# Altium PCB J65VIA.PcbDoc
Units mil, origin at the board's own origin, x right, y up, seen from the top; angles counter-clockwise.
Board outline 2245.86 x 3635.78 mil, 2 copper layers (Top Layer, Bottom Layer); 7 components, 39 nets, 116 pads, 577 vias.
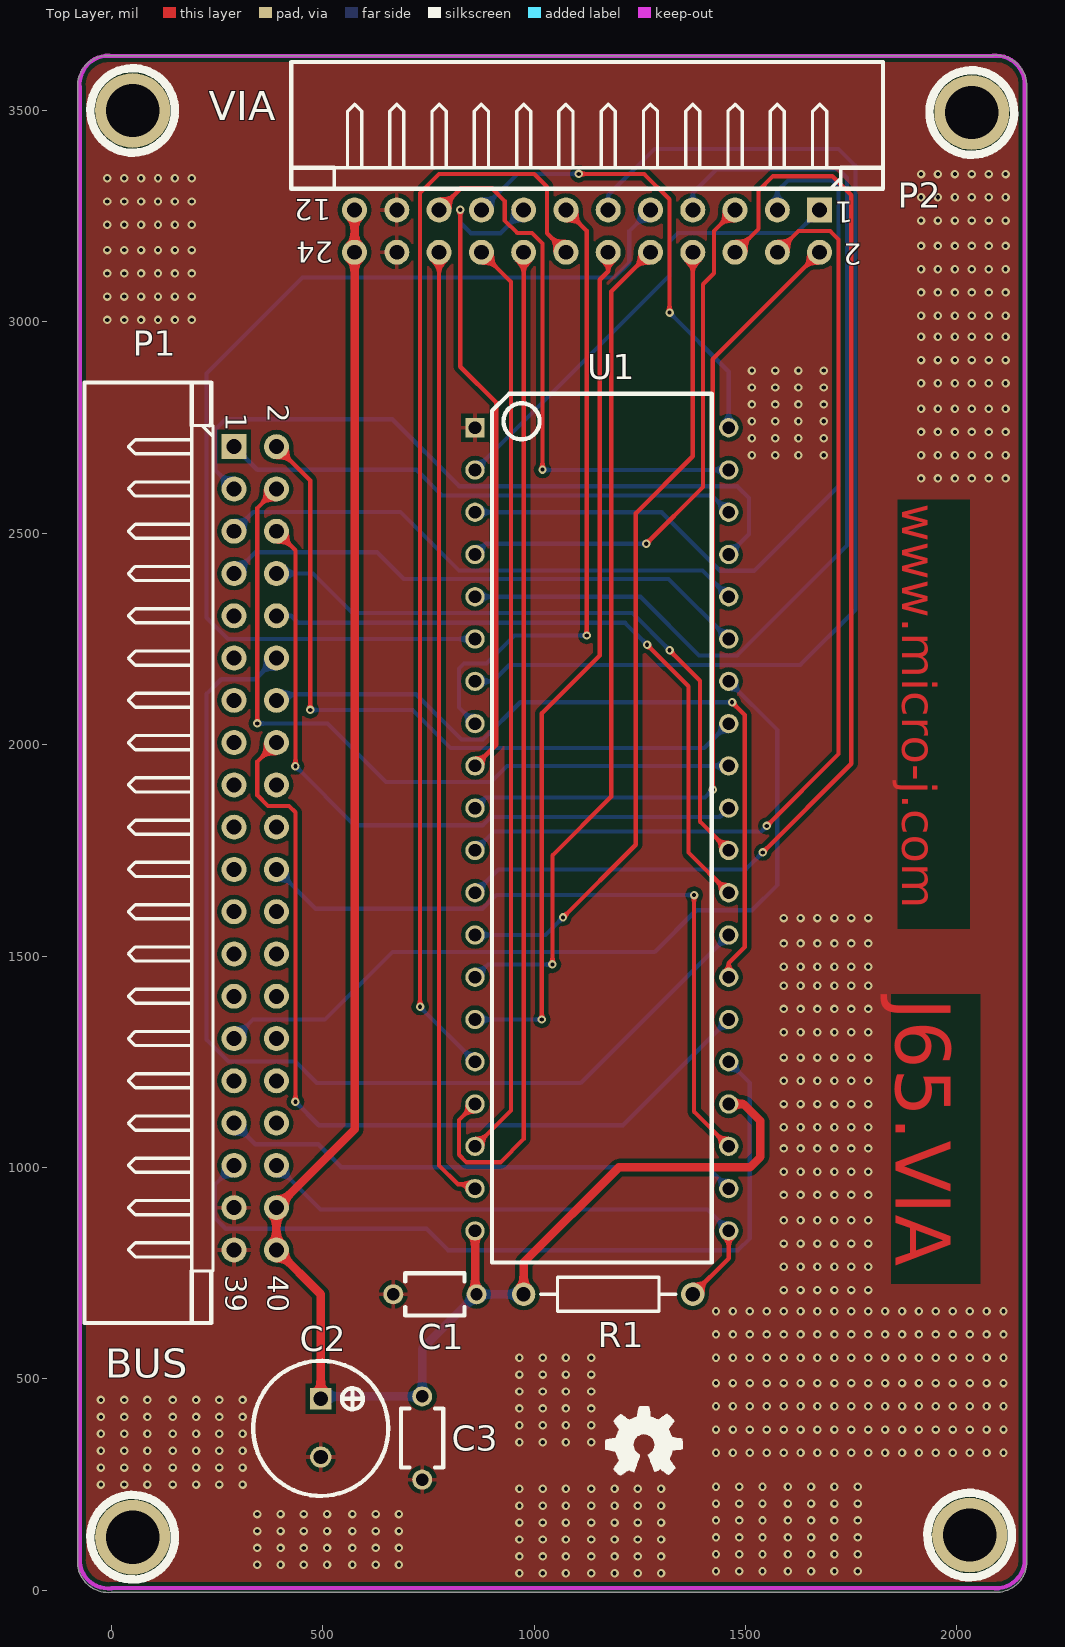
[diagram p0: Top Layer view]
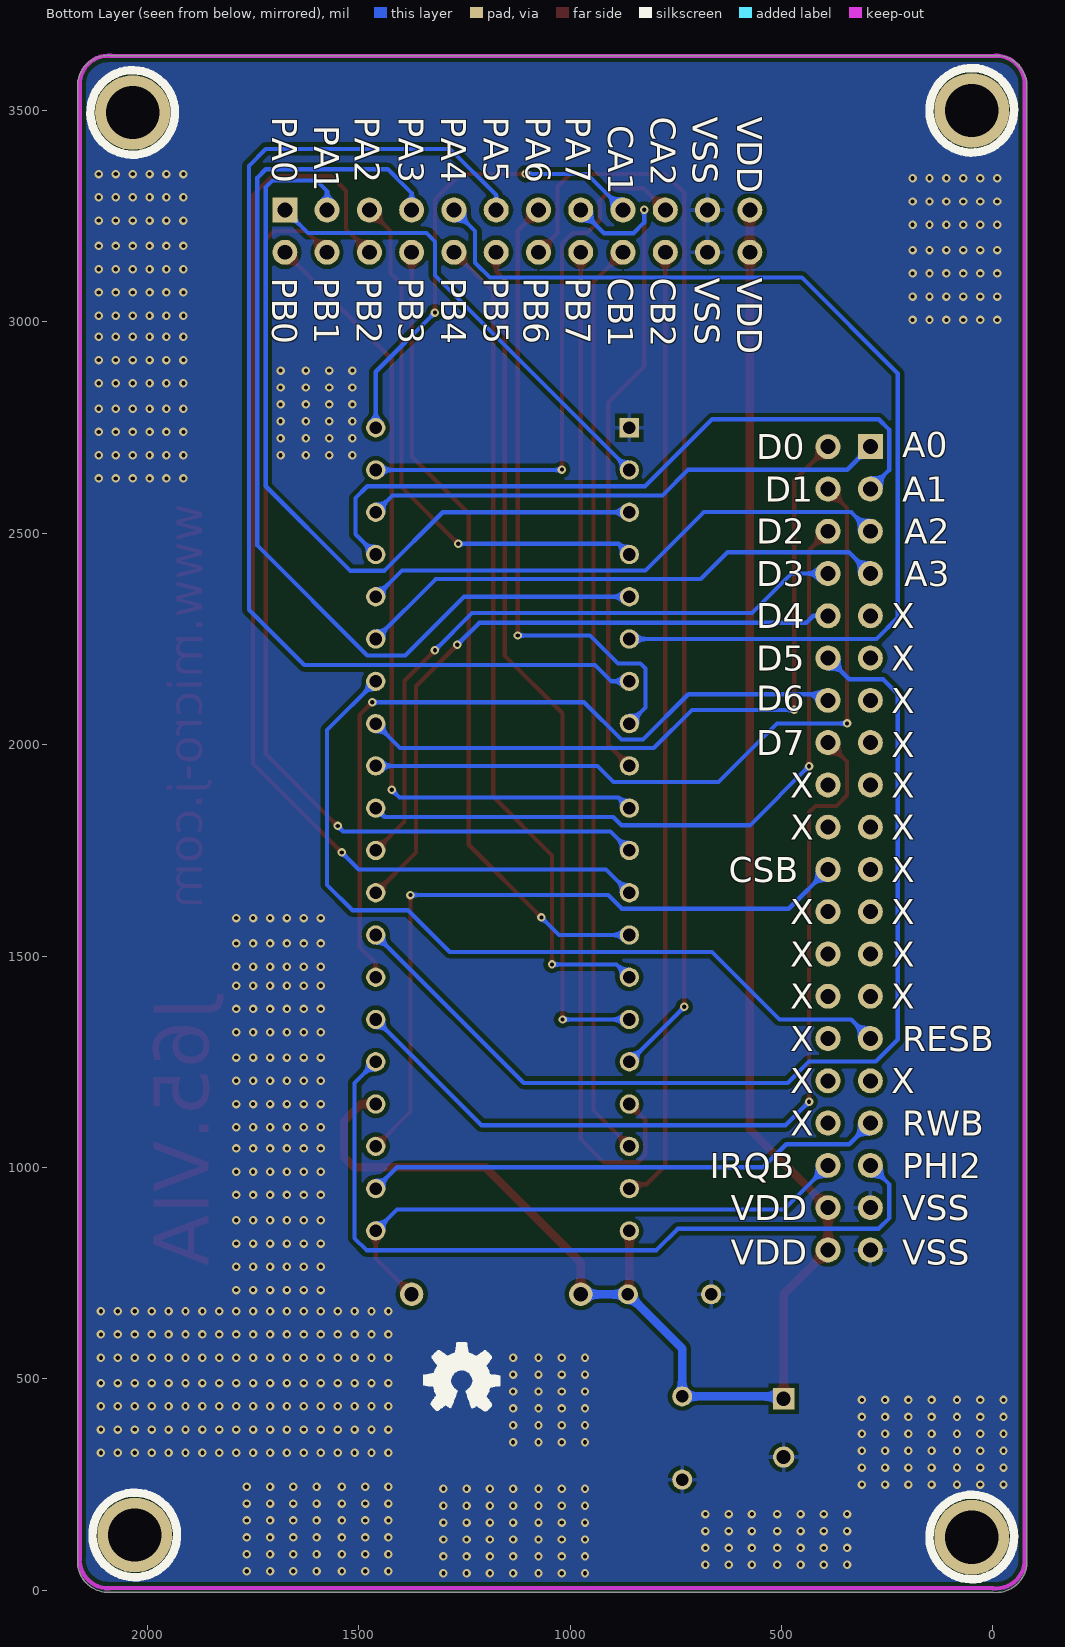
[diagram p1: Bottom Layer view, seen from below]

## Layer stack, top to bottom
Top Solder: solder mask 0.4, Solder Resist, Dk 3.5
Top Layer: signal copper 1.4
Dielectric 1: dielectric 12.6, FR-4, Dk 4.8
Bottom Layer: signal copper 1.4
Bottom Solder: solder mask 0.4, Solder Resist, Dk 3.5

## Board outline
-80.38,70.2 ccw(c-7.5,67.5) -0.82,-5.12 ccw(c0,-0.17) 0,-5.19 2088.11,-4.65 ccw(c2090,0) 2089.81,-5.01 ccw(c2092.51,67.87) 2165.44,67.87 ccw(c2092.51,67.87) 2165.02,75.73 2165.02,3553.11 ccw(c2160.37,3554.99) 2165.38,3554.8 ccw(c2092.5,3557.5) 2165.43,3557.5 ccw(c2092.5,3557.5) 2086.44,3630.18 ccw(c2085.02,3625.37) 2085.01,3630.38 -2.84,3629.9 ccw(c-4.98,3625.37) -4.8,3630.38 ccw(c-7.5,3557.5) -80.01,3549.74 -80.01,71.9 ccw(c-75.37,70.01)

## Design rules (kind name [scope] priority, off if disabled: settings)
Clearance [All] p1: gap=10 ignorepadtopadclearanceinfootprint=FALSE except(0: Arc-Hole Track-Hole SMDPad-Hole THPad-Hole Via-Hole Fill-Hole Poly-Hole Region-Hole Text-Hole)
PolygonConnect [All] p1: connectstyle=Relief reliefconductorwidth=10 reliefentries=4 polygonreliefangle="90 Angle" airgapwidth=10
RoutingVias [All] p1: holewidth=10 width=20 viastyle="Through Hole" minholewidth=10 minwidth=20 maxholewidth=12 maxwidth=24
SolderMaskExpansion [All] p1: expansion=4
Width [All] p1: maxlimit=50 minlimit=10 preferedwidth=10 minimp=50.000000 maximp=50.000000 favimp=50.000000
30 further rules are at their usual default settings.

## Components (designator, comment, footprint, x,y, rotation, side; value= is the part's Value field where it differs from the comment)
C1 "0.1uF" CAP508 765,700 r180 top
C2 "470uF" CAP8X12 495,452.8 r270 top
C3 "0.1uF" CAP508 735,360 r270 top
P1 "HEAD20X2" HD20X2 136,1707 r270 top
P2 "HEAD12X2" HD12X2 1125,3215 r180 top
R1 "10K" AXIAL-0.4 1175,700 r0 top
U1 "R65C22" DIP40 1160,1800 r0 top

## Footprints (in the part's own frame and the unit in brackets; to place one, negate y for a bottom-side part, rotate by r counter-clockwise, add the part's x,y. Pads: shape width x height; smd on the part's side, far side on the other; paste and mask are expansions set on the pad)
AXIAL-0.4 [mm]
  round 1.4 hole 0.85: 1(-5.08,0) 2(5.08,0)
  silkscreen extent -4.06,-1.02 4.06,1.02
CAP8X12 [mm]
  rect 1.275x1.275 hole 0.85: 1(0,0)
  round 1.275 hole 0.85: 2(3.5,0)
  silkscreen extent -2.28,-4.05 5.84,4.06
CAP508 [mm]
  round 1.2 hole 0.75: 1(-2.5,0) 2(2.5,0)
  silkscreen extent -1.78,-1.27 1.78,1.27
DIP40 [mm]
  rect 1.16x1.16 hole 0.76: 1(-7.62,24.13)
  round 1.16 hole 0.76: 2(-7.62,21.59) 3(-7.62,19.05) 4(-7.62,16.51) 5(-7.62,13.97) 6(-7.62,11.43) 7(-7.62,8.89) 8(-7.62,6.35) 9(-7.62,3.81) 10(-7.62,1.27) 11(-7.62,-1.27) 12(-7.62,-3.81) 13(-7.62,-6.35) 14(-7.62,-8.89) 15(-7.62,-11.43) 16(-7.62,-13.97) 17(-7.62,-16.51) 18(-7.62,-19.05) 19(-7.62,-21.59) 20(-7.62,-24.13) 21(7.62,-24.13) 22(7.62,-21.59) 23(7.62,-19.05) 24(7.62,-16.51) 25(7.62,-13.97) 26(7.62,-11.43) 27(7.62,-8.89) 28(7.62,-6.35) 29(7.62,-3.81) 30(7.62,-1.27) 31(7.62,1.27) 32(7.62,3.81) 33(7.62,6.35) 34(7.62,8.89) 35(7.62,11.43) 36(7.62,13.97) 37(7.62,16.51) 38(7.62,19.05) 39(7.62,21.59) 40(7.62,24.13)
  silkscreen extent -6.6,-26.04 6.6,26.16
HD12X2 [mm]
  rect 1.5x1.5 hole 0.9: 1(-13.97,-1.27)
  round 1.5 hole 0.9: 2(-13.97,1.27) 3(-11.43,-1.27) 4(-11.43,1.27) 5(-8.89,-1.27) 6(-8.89,1.27) 7(-6.35,-1.27) 8(-6.35,1.27) 9(-3.81,-1.27) 10(-3.81,1.27) 11(-1.27,-1.27) 12(-1.27,1.27) 13(1.27,-1.27) 14(1.27,1.27) 15(3.81,-1.27) 16(3.81,1.27) 17(6.35,-1.27) 18(6.35,1.27) 19(8.89,-1.27) 20(8.89,1.27) 21(11.43,-1.27) 22(11.43,1.27) 23(13.97,-1.27) 24(13.97,1.27)
  silkscreen extent -17.78,-10.16 17.78,-2.54
HD20X2 [mm]
  rect 1.5x1.5 hole 0.9: 1(-25.349,3.912)
  round 1.5 hole 0.9: 2(-25.349,6.452) 3(-22.809,3.912) 4(-22.809,6.452) 5(-20.269,3.912) 6(-20.269,6.452) 7(-17.729,3.912) 8(-17.729,6.452) 9(-15.189,3.912) 10(-15.189,6.452) 11(-12.649,3.912) 12(-12.649,6.452) 13(-10.109,3.912) 14(-10.109,6.452) 15(-7.569,3.912) 16(-7.569,6.452) 17(-5.029,3.912) 18(-5.029,6.452) 19(-2.489,3.912) 20(-2.489,6.452) 21(0.051,3.912) 22(0.051,6.452) 23(2.591,3.912) 24(2.591,6.452) 25(5.131,3.912) 26(5.131,6.452) 27(7.671,3.912) 28(7.671,6.452) 29(10.211,3.912) 30(10.211,6.452) 31(12.751,3.912) 32(12.751,6.452) 33(15.291,3.912) 34(15.291,6.452) 35(17.831,3.912) 36(17.831,6.452) 37(20.371,3.912) 38(20.371,6.452) 39(22.911,3.912) 40(22.911,6.452)
  silkscreen extent -29.21,-5.08 27.31,2.64

## Part data
C1 C3: library part CAP1
C2: library part CAP2
R1: library part RES1
P1 P2: LatestRevisionDate=17-Jul-2002, LatestRevisionNote="Re-released for DXP Platform.", Publisher="Altium Limited"

## Free pads (board coordinates)
  round 177.17 hole 125.98: 0(50.01,125.37) 0(50.01,3500.37) 0(2030.01,130.37) 0(2035.01,3495.37)

## Via types
v1: diameter 20, hole 10, Top Layer to Bottom Layer, tented both sides, 577 vias

## Nets (pads, with @x,y where several pads share a name; then routed paths per layer and width w, separated by ;. In a path a pad name is that pad's centre, name@x,y a point inside that pad or via, vN(x,y) a via of type N, cw(c..) or ccw(c..) an arc to the next point about the centre after c; other vN are vias at no path point)
A0: P1.1 U1.38 | length 1234.2
  Bottom Layer w10: P1.1 344.63,2650.37 721.28,2650.37 781.85,2589.8 1420.2,2589.8 U1.38
A1: P1.3 U1.37 | length 1662.2
  Bottom Layer w10: P1.3 245.47,2649.53 245.47,2745.47 270,2770 664.18,2770 822.81,2611.37 1480.02,2611.37 1508.02,2583.37 1508.02,2498.02 U1.37
A2: P1.5 U1.36 | length 1271.8
  Bottom Layer w10: P1.5 335.37,2550.37 683.81,2550.37 822.02,2412.16 1397.84,2412.16 U1.36
A3: P1.7 U1.35 | length 1275.9
  Bottom Layer w10: P1.7 340.37,2455.37 628.02,2455.37 691.22,2392.16 1317.84,2392.16 U1.35
CA1: P2.17 U1.40 | length 1103.6
  Top Layer w10: v1(1105.02,3350.37) 1260.02,3350.37 1320.02,3290.37 v1(1320.02,3022.37)
  Bottom Layer w10: P2.17 960.37,3350.37 v1(1105.02,3350.37) ; v1(1320.02,3022.37) 1460,2882.39 U1.40
CA2: P2.19 U1.39 | length 1322.4
  Top Layer w10: P2.19 826.37,3316.37 900.02,3316.37 930.02,3286.37 930.02,3240.37 960.02,3210.37 994.63,3210.37 1019.53,3185.47 v1(1019.53,2650.86)
  Bottom Layer w10: v1(1019.53,2650.86) 1020.39,2650 U1.39
CB1: P2.18 U1.18 | length 2179.2
  Top Layer w10: U1.18 945,1135 945,3095 P2.18
CB2: P2.20 U1.19 | length 2273.9
  Top Layer w10: P2.20 775.02,1004.98 819.63,960.37 860,960.37 U1.19
CSB: P1.22 U1.23 | length 1668.1
  Top Layer w10: v1(1378.02,1644.37) 1378.02,1131.98 U1.23
  Bottom Layer w10: P1.22 482.84,1612.16 877.81,1612.16 910.02,1644.37 v1(1378.02,1644.37)
D0: P1.2 U1.33 | length 1707.1
  Top Layer w10: P1.2 470.02,2624.98 v1(470.02,2082.37)
  Bottom Layer w10: v1(470.02,2082.37) 711.96,2082.37 802.16,1992.16 1402.16,1992.16 U1.33
D1: P1.4 U1.32 | length 1761.2
  Top Layer w10: v1(345.02,2050.37) 345.02,2560.02 P1.4
  Bottom Layer w10: v1(345.02,2050.37) 511.02,2050.37 649.22,1912.16 897.84,1912.16 935.67,1950 U1.32
D2: P1.6 U1.31 | length 1674.1
  Top Layer w10: P1.6 435.02,2459.98 v1(435.02,1949.37)
  Bottom Layer w10: v1(435.02,1949.37) 575.02,1809.37 878.02,1809.37 898.02,1829.37 1439.37,1829.37 U1.31
D3: P1.8 U1.30 | length 1536.6
  Top Layer w10: v1(1320.02,2223.37) 1392.02,2151.37 1392.02,1817.98 U1.30
  Bottom Layer w10: P1.8 476.39,2405 570.02,2311.37 1232.02,2311.37 v1(1320.02,2223.37)
D4: P1.10 U1.29 | length 1571.8
  Top Layer w10: v1(1267.02,2236.37) 1365.02,2138.37 1365.02,1744.98 U1.29
  Bottom Layer w10: P1.10 425,2305 441.63,2288.37 1215.02,2288.37 v1(1267.02,2236.37)
D5: P1.12 U1.28 | length 2440.4
  Bottom Layer w10: P1.12 340,2155 259.65,2155 225.02,2120.37 225.02,1302.37 277.02,1250.37 435.02,1250.37 485.39,1200 1110,1200 U1.28
D6: P1.14 U1.27 | length 1843.5
  Top Layer w10: U1.27 1460,1483.35 1498.02,1521.37 1498.02,2070.37 v1(1468.02,2100.37)
  Bottom Layer w10: P1.14 404.37,2119.37 720.63,2119.37 827.84,2012.16 878.81,2012.16 967.02,2100.37 v1(1468.02,2100.37)
D7: P1.16 U1.26 | length 2086.3
  Top Layer w10: P1.16 345.02,1960.02 345.02,1880.37 370.02,1855.37 420.02,1855.37 435.02,1840.37 v1(435.02,1155.37)
  Bottom Layer w10: v1(435.02,1155.37) 490.39,1100 1210,1100 U1.26
IRQB: P1.36 R1.2 U1.21 | length 1319.4
  Top Layer w10: R1.2 1460,785 U1.21
  Bottom Layer w10: P1.36 494.63,900.37 1409.63,900.37 U1.21
PA0: P2.1 U1.2 | length 1116.8
  Bottom Layer w10: U1.2 1320.02,3110.02 1320.02,3190.37 1340.02,3210.37 1620.37,3210.37 P2.1
PA1: P2.3 U1.3 | length 1915.1
  Bottom Layer w10: U1.3 1301.39,2550 1440.02,2411.37 1520.02,2411.37 1720.02,2611.37 1720.02,3319.37 1704.39,3335 1600,3335 1575,3310 P2.3
PA2: P2.5 U1.4 | length 1292.1
  Top Layer w10: v1(1265.02,2475.37) 1399.02,2609.37 1399.02,3089.37 1425.02,3115.37 1425.02,3215.02 P2.5
  Bottom Layer w10: U1.4 885.37,2475.37 v1(1265.02,2475.37)
PA3: P2.7 U1.5 | length 2351.8
  Bottom Layer w10: U1.5 1251.39,2350 1390.02,2211.37 1480.02,2211.37 1740.02,2471.37 1740.02,3341.37 1720.02,3361.37 1431.37,3361.37 1375,3305 P2.7
PA4: P2.9 U1.6 | length 2487.7
  Bottom Layer w10: U1.6 275.39,2250 225,2300.39 225,2877.97 452.03,3105 596.52,3105 1190,3105 1225,3140 1225,3215 P2.9
PA5: P2.11 U1.7 | length 2702.1
  Bottom Layer w10: U1.7 902.65,2150 941.02,2188.37 1629.02,2188.37 1760.02,2319.37 1760.02,3369.37 1720.02,3409.37 1284.37,3409.37 1175,3300 P2.11
PA6: P2.13 U1.8 | length 1507.3
  Top Layer w10: P2.13 1124.02,3215.98 v1(1124.02,2258.37)
  Bottom Layer w10: U1.8 822.02,2087.98 822.02,2180.37 834.02,2192.37 887.02,2192.37 953.02,2258.37 v1(1124.02,2258.37)
PA7: P2.15 U1.9 | length 1584.8
  Top Layer w10: v1(825.02,3265.37) 825.02,2894.19 910,2809.21 910,2000 U1.9
  Bottom Layer w10: v1(825.02,3265.37) 825.02,3234.98 850,3210 920,3210 P2.15
PB0: P2.2 U1.10 | length 1956.4
  Top Layer w10: v1(1422.02,1893.37) 1422.02,2912.02 P2.2
  Bottom Layer w10: U1.10 885,1875 1403.65,1875 v1(1422.02,1893.37)
PB1: P2.4 U1.11 | length 2345.6
  Top Layer w10: v1(1550.02,1807.84) 1720.02,1977.84 1720.02,3195.02 1700.02,3215.02 1625.02,3215.02 P2.4
  Bottom Layer w10: U1.11 905,1795 1537.18,1795 v1(1550.02,1807.84)
PB2: P2.6 U1.12 | length 2782.3
  Top Layer w10: P2.6 1530.37,3220.37 1530.37,3310.37 1565,3345 1705,3345 1750,3300 1750,1954.88 v1(1540.48,1745.37)
  Bottom Layer w10: U1.12 915,1705 1500.12,1705 v1(1540.48,1745.37)
PB3: P2.8 U1.13 | length 1925.9
  Top Layer w10: v1(1068.02,1591.37) 1240.02,1763.37 1240.02,2547.37 1375,2682.35 P2.8
  Bottom Layer w10: U1.13 1026.65,1550 v1(1068.02,1591.37)
PB4: P2.10 U1.14 | length 1976.3
  Top Layer w10: v1(1043.02,1480.37) 1043.02,1738.37 1182.02,1877.37 1182.02,3072.02 P2.10
  Bottom Layer w10: U1.14 890.37,1480.37 v1(1043.02,1480.37)
PB5: P2.12 U1.15 | length 2038
  Top Layer w10: v1(1018.02,1350) 1018.02,2074.37 1155.02,2211.37 1155.02,3100.02 1175,3120 P2.12
  Bottom Layer w10: U1.15 v1(1018.02,1350)
PB6: P2.14 U1.16 | length 2613.5
  Top Layer w10: v1(730.02,1379.98) 730.02,3305.02 775,3350 1000,3350 1030.02,3319.98 1030.02,3209.98 P2.14
  Bottom Layer w10: v1(730.02,1379.98) U1.16
PB7: P2.16 U1.17 | length 2416.5
  Top Layer w10: U1.17 822.16,1112.16 822.16,1030.02 840.02,1012.16 920.02,1012.16 975,1067.15 P2.16
PHI2: P1.35 U1.25 | length 1889.7
  Bottom Layer w10: P1.35 245.02,960.02 245.02,880.37 270.39,855 745.39,855 796.02,804.37 1482.02,804.37 1510,832.35 1510,1200 U1.25
RESB: P1.29 U1.34 | length 1964.8
  Bottom Layer w10: P1.29 334.98,1349.98 504.63,1349.98 664.65,1510 1285,1510 1383.37,1608.37 1515.02,1608.37 1575.02,1668.37 1575.02,2034.98 U1.34
RWB: P1.33 U1.22 | length 1234.2
  Bottom Layer w10: P1.33 340.02,1054.98 489.02,1054.98 543.63,1000.37 1409.63,1000.37 U1.22
VDD: C1.1 C2.1 C3.1 P1.38 P1.40 P2.23 P2.24 R1.1 U1.20 U1.24 | length 4643.8
  Top Layer w20: C2.1 495,700 P1.40 P1.38 575.02,1090.02 P2.24 P2.23 ; C1.1@860,700 U1.20 ; R1.1 975,775 1200,1000 1510,1000 1535,1025 1535,1110 1495,1150 U1.24
  Bottom Layer w20: C2.1@495,458.43 C3.1 735,571.58 C1.1 R1.1
VSS: C1.2 C2.2 C3.2 P1.37 P1.39 P2.21 P2.22 U1.1
  other v1: 965,40 1020,40 1075,40 1135,40 1190,40 1245,40 1300,40 1430,45 1485,45 1540,45 1600,45 1655,45 1710,45 1765,45 345,60 400,60 455,60 510,60 570,60 625,60 680,60 965,80 1020,80 1075,80 1135,80 1190,80 1245,80 1300,80 1430,85 1485,85 1540,85 1600,85 1655,85 1710,85 1765,85 345,100 400,100 455,100 510,100 570,100 625,100 680,100 965,120 1020,120 1075,120 1135,120 1190,120 1245,120 1300,120 1430,125 1485,125 1540,125 1600,125 1655,125 1710,125 1765,125 345,140 400,140 455,140 510,140 570,140 625,140 680,140 965,160 1020,160 1075,160 1135,160 1190,160 1245,160 1300,160 1430,165 1485,165 1540,165 1600,165 1655,165 1710,165 1765,165 345,180 400,180 455,180 510,180 570,180 625,180 680,180 965,200 1020,200 1075,200 1135,200 1190,200 1245,200 1300,200 1430,205 1485,205 1540,205 1600,205 1655,205 1710,205 1765,205 965,240 1020,240 1075,240 1135,240 1190,240 1245,240 1300,240 1430,245 1485,245 1540,245 1600,245 1655,245 1710,245 1765,245 -25,250 30,250 85,250 145,250 200,250 255,250 310,250 -25,290 30,290 85,290 145,290 200,290 255,290 310,290 1430,325 1470,325 1510,325 1550,325 1590,325 1630,325 1670,325 1710,325 1750,325 1790,325 1830,325 1870,325 1910,325 1950,325 1990,325 2030,325 2070,325 2110,325 -25,330 30,330 85,330 145,330 200,330 255,330 310,330 965,350 1020,350 1075,350 1135,350 -25,370 30,370 85,370 145,370 200,370 255,370 310,370 1430,380 1470,380 1510,380 1550,380 1590,380 1630,380 1670,380 1710,380 1750,380 1790,380 1830,380 1870,380 1910,380 1950,380 1990,380 2030,380 2070,380 2110,380 965,390 1020,390 1075,390 1135,390 -25,410 30,410 85,410 145,410 200,410 255,410 310,410 965,430 1020,430 1075,430 1135,430 1430,435 1470,435 1510,435 1550,435 1590,435 1630,435 1670,435 1710,435 1750,435 1790,435 1830,435 1870,435 1910,435 1950,435 1990,435 2030,435 2070,435 2110,435 -25,450 30,450 85,450 145,450 200,450 255,450 310,450 965,470 1020,470 1075,470 1135,470 1430,490 1470,490 1510,490 1550,490 1590,490 1630,490 1670,490 1710,490 1750,490 1790,490 1830,490 1870,490 1910,490 1950,490 1990,490 2030,490 2070,490 2110,490 965,510 1020,510 1075,510 1135,510 965,550 1020,550 1075,550 1135,550 1430,550 1470,550 1510,550 1550,550 1590,550 1630,550 1670,550 1710,550 1750,550 1790,550 1830,550 1870,550 1910,550 1950,550 1990,550 2030,550 2070,550 2110,550 1430,605 1470,605 1510,605 1550,605 1590,605 1630,605 1670,605 1710,605 1750,605 1790,605 1830,605 1870,605 1910,605 1950,605 1990,605 2030,605 2070,605 2110,605 1430,660 1470,660 1510,660 1550,660 1590,660 1630,660 1670,660 1710,660 1750,660 1790,660 1830,660 1870,660 1910,660 1950,660 1990,660 2030,660 2070,660 2110,660 1590,710 1630,710 1670,710 1710,710 1750,710 1790,710 1590,765 1630,765 1670,765 1710,765 1750,765 1790,765 1590,820 1630,820 1670,820 1710,820 1750,820 1790,820 1590,875 1630,875 1670,875 1710,875 1750,875 1790,875 1590,935 1630,935 1670,935 1710,935 1750,935 1790,935 1590,990 1630,990 1670,990 1710,990 1750,990 1790,990 1590,1045 1630,1045 1670,1045 1710,1045 1750,1045 1790,1045 1590,1095 1630,1095 1670,1095 1710,1095 1750,1095 1790,1095 1590,1150 1630,1150 1670,1150 1710,1150 1750,1150 1790,1150 1590,1205 1630,1205 1670,1205 1710,1205 1750,1205 1790,1205 1590,1260 1630,1260 1670,1260 1710,1260 1750,1260 1790,1260 1590,1320 1630,1320 1670,1320 1710,1320 1750,1320 1790,1320 1590,1375 1630,1375 1670,1375 1710,1375 1750,1375 1790,1375 1590,1430 1630,1430 1670,1430 1710,1430 1750,1430 1790,1430 1590,1475 1630,1475 1670,1475 1710,1475 1750,1475 1790,1475 1590,1530 1630,1530 1670,1530 1710,1530 1750,1530 1790,1530 1590,1590 1630,1590 1670,1590 1710,1590 1750,1590 1790,1590 1915,2630 1955,2630 1995,2630 2035,2630 2075,2630 2115,2630 1515,2685 1570,2685 1625,2685 1685,2685 1915,2685 1955,2685 1995,2685 2035,2685 2075,2685 2115,2685 1515,2725 1570,2725 1625,2725 1685,2725 1915,2740 1955,2740 1995,2740 2035,2740 2075,2740 2115,2740 1515,2765 1570,2765 1625,2765 1685,2765 1915,2795 1955,2795 1995,2795 2035,2795 2075,2795 2115,2795 1515,2805 1570,2805 1625,2805 1685,2805 1515,2845 1570,2845 1625,2845 1685,2845 1915,2855 1955,2855 1995,2855 2035,2855 2075,2855 2115,2855 1515,2885 1570,2885 1625,2885 1685,2885 1915,2910 1955,2910 1995,2910 2035,2910 2075,2910 2115,2910 1915,2965 1955,2965 1995,2965 2035,2965 2075,2965 2115,2965 -10,3005 30,3005 70,3005 110,3005 150,3005 190,3005 1915,3015 1955,3015 1995,3015 2035,3015 2075,3015 2115,3015 -10,3060 30,3060 70,3060 110,3060 150,3060 190,3060 1915,3070 1955,3070 1995,3070 2035,3070 2075,3070 2115,3070 -10,3115 30,3115 70,3115 110,3115 150,3115 190,3115 1915,3125 1955,3125 1995,3125 2035,3125 2075,3125 2115,3125 -10,3170 30,3170 70,3170 110,3170 150,3170 190,3170 1915,3180 1955,3180 1995,3180 2035,3180 2075,3180 2115,3180 -10,3230 30,3230 70,3230 110,3230 150,3230 190,3230 1915,3240 1955,3240 1995,3240 2035,3240 2075,3240 2115,3240 -10,3285 30,3285 70,3285 110,3285 150,3285 190,3285 1915,3295 1955,3295 1995,3295 2035,3295 2075,3295 2115,3295 -10,3340 30,3340 70,3340 110,3340 150,3340 190,3340 1915,3350 1955,3350 1995,3350 2035,3350 2075,3350 2115,3350
pads on no net: P1.9 P1.11 P1.13 P1.15 P1.17 P1.18 P1.19 P1.20 P1.21 P1.23 P1.24 P1.25 P1.26 P1.27 P1.28 P1.30 P1.31 P1.32 P1.34

## Polygon pours and split planes (outlines as drawn)
no net on Top Solder "NONET_L-01_P-001" (solid, remove dead copper): -1839.98,2335.37
VSS on Top Layer "NONET_L-01_P-001" (solid, remove dead copper, pour order 8): 2480,3935 2480,-395 2465,-380 -365,-380 -365,3840 -270,3935
VSS on Bottom Layer "NONET_L-01_P-001" (solid, remove dead copper, pour order 10): 2489.5,3903.48 2489.5,-131.52 2494.5,-136.52 2444.5,-186.52 -430.5,-186.52 -430.5,3853.48 -380.5,3903.48

## Keep-outs
Keep-Out Layer:
  lines w10: -75.38,74.64 ccw(c-7.52,72.13) -0.02,4.63 ; -75.01,75 -75.01,3554.63 cw(c-7.51,3562.13) -5,3630 ; -10.02,3629.52 2085,3630 ; -0.02,4.46 2090,5 ; 2084.98,3629.63 cw(c2092.48,3562.13) 2160.35,3559.62 ; 2089.98,4.63 ccw(c2092.5,72.5) 2160,80 ; 2159.99,80 2159.99,3559.62

## Other copper
Top Layer:
  text "www.micro-j.com" at 1870,2570 h80 r270
  text "J65.VIA" at 1855,1400 h130 r270

## Silkscreen, mask and mechanical layers (free items; w line width, h text height)
Top Overlay:
  drawing of 305 lines, arcs and shapes, not listed
  text "VIA" at 230,3455 h118.11
  text "BUS" at -15,480 h118.11
Bottom Overlay:
  drawing of 305 lines, arcs and shapes, not listed
  text "VDD" at 605,3484.99 h60 r90
  text "VSS" at 710,3484.99 h60 r90
  text "CA2" at 810,3484.99 h60 r90
  text "PA7" at 1010,3484.99 h60 r90
  text "PA6" at 1105,3484.99 h60 r90
  text "PA5" at 1205,3484.99 h60 r90
  text "PA4" at 1305,3484.99 h60 r90
  text "PA3" at 1405,3484.99 h60 r90
  text "PA2" at 1510,3484.99 h60 r90
  text "PA0" at 1705,3484.99 h60 r90
  text "CA1" at 910,3465 h60 r90
  text "PA1" at 1605,3465 h60 r90
  text "VDD" at 605,3105.02 h60 r90
  text "VSS" at 705,3105.02 h60 r90
  text "CB2" at 810,3105.02 h60 r90
  text "CB1" at 910,3105.02 h60 r90
  text "PB7" at 1010,3105.02 h60 r90
  text "PB6" at 1110,3105.02 h60 r90
  text "PB5" at 1205,3105.02 h60 r90
  text "PB4" at 1305,3105.02 h60 r90
  text "PB3" at 1405,3105.02 h60 r90
  text "PB2" at 1505,3105.02 h60 r90
  text "PB1" at 1605,3105.02 h60 r90
  text "PB0" at 1705,3105.02 h60 r90
  text "A0" at 215,2680 h60
  text "D0" at 560.02,2675 h60
  text "A1" at 215,2575 h60
  text "D1" at 540.02,2575 h60
  text "A2" at 210,2475 h60
  text "D2" at 560.02,2475 h60
  text "A3" at 210,2375 h60
  text "D3" at 560.02,2375 h60
  text "X" at 240,2275 h60
  text "D4" at 560.02,2275 h60
  text "X" at 240,2175 h60
  text "D5" at 560.02,2175 h60
  text "D6" at 560.02,2080 h60
  text "X" at 240,2075 h60
  text "D7" at 560.02,1975 h60
  text "X" at 240,1970 h60
  text "X" at 240,1875 h60
  text "X" at 480,1875 h60
  text "X" at 240,1775 h60
  text "X" at 480,1775 h60
  text "X" at 240,1675 h60
  text "CSB" at 625,1675 h60
  text "X" at 240,1575 h60
  text "X" at 480,1575 h60
  text "X" at 240,1475 h60
  text "X" at 480,1475 h60
  text "X" at 240,1375 h60
  text "X" at 480,1375 h60
  text "RESB" at 215,1275 h60
  text "X" at 480,1275 h60
  text "X" at 240,1175 h60
  text "X" at 480,1175 h60
  text "RWB" at 215,1075 h60
  text "X" at 480,1075 h60
  text "PHI2" at 215,975 h60
  text "IRQB" at 669.98,975 h60
  text "VSS" at 215,875 h60
  text "VDD" at 620,875 h60
  text "VSS" at 215,770 h60
  text "VDD" at 620,770 h60
Top Solder:
  region: 2025,1575 2025,2585 1870,2585 1870,1575
  region: 1840,1400 1840,735 2050,735 2050,1400
Mechanical 1:
  lines w10: -75.37,70.01 ccw(c-7.5,67.5) 0,0 ; -75,70.37 -75,3550 cw(c-7.5,3557.5) -4.98,3625.37 ; -10,3624.89 2085.01,3625.37 ; 0,-0.17 2090.01,0.37 ; 2085,3625 cw(c2092.5,3557.5) 2160.37,3554.99 ; 2090,0 ccw(c2092.51,67.87) 2160.01,75.37 2160,3554.99

## Text inside footprints (layer, text, board x,y; h text height)
P1: Top Overlay "2" at 370,2805 h50 r270; Top Overlay "1" at 270,2785 h50 r270; Top Overlay "39" at 270,745 h50 r270; Top Overlay "40" at 370,745 h50 r270
P2: Top Overlay "2" at 1775,3185 h50 r180; Top Overlay "1" at 1755,3285 h50 r180; Top Overlay "12" at 520,3290 h50 r180; Top Overlay "24" at 525,3190 h50 r180